# Altium PCB Siwa_PCB.PcbDoc (part 2 of 2)
Units mm, origin at the board's own origin, x right, y up, seen from the top; angles counter-clockwise.
Board outline 120 x 90 mm, 2 copper layers (Top Layer, Bottom Layer), stack 1.569 mm thick; 68 components, 95 nets, 317 pads, 67 vias.
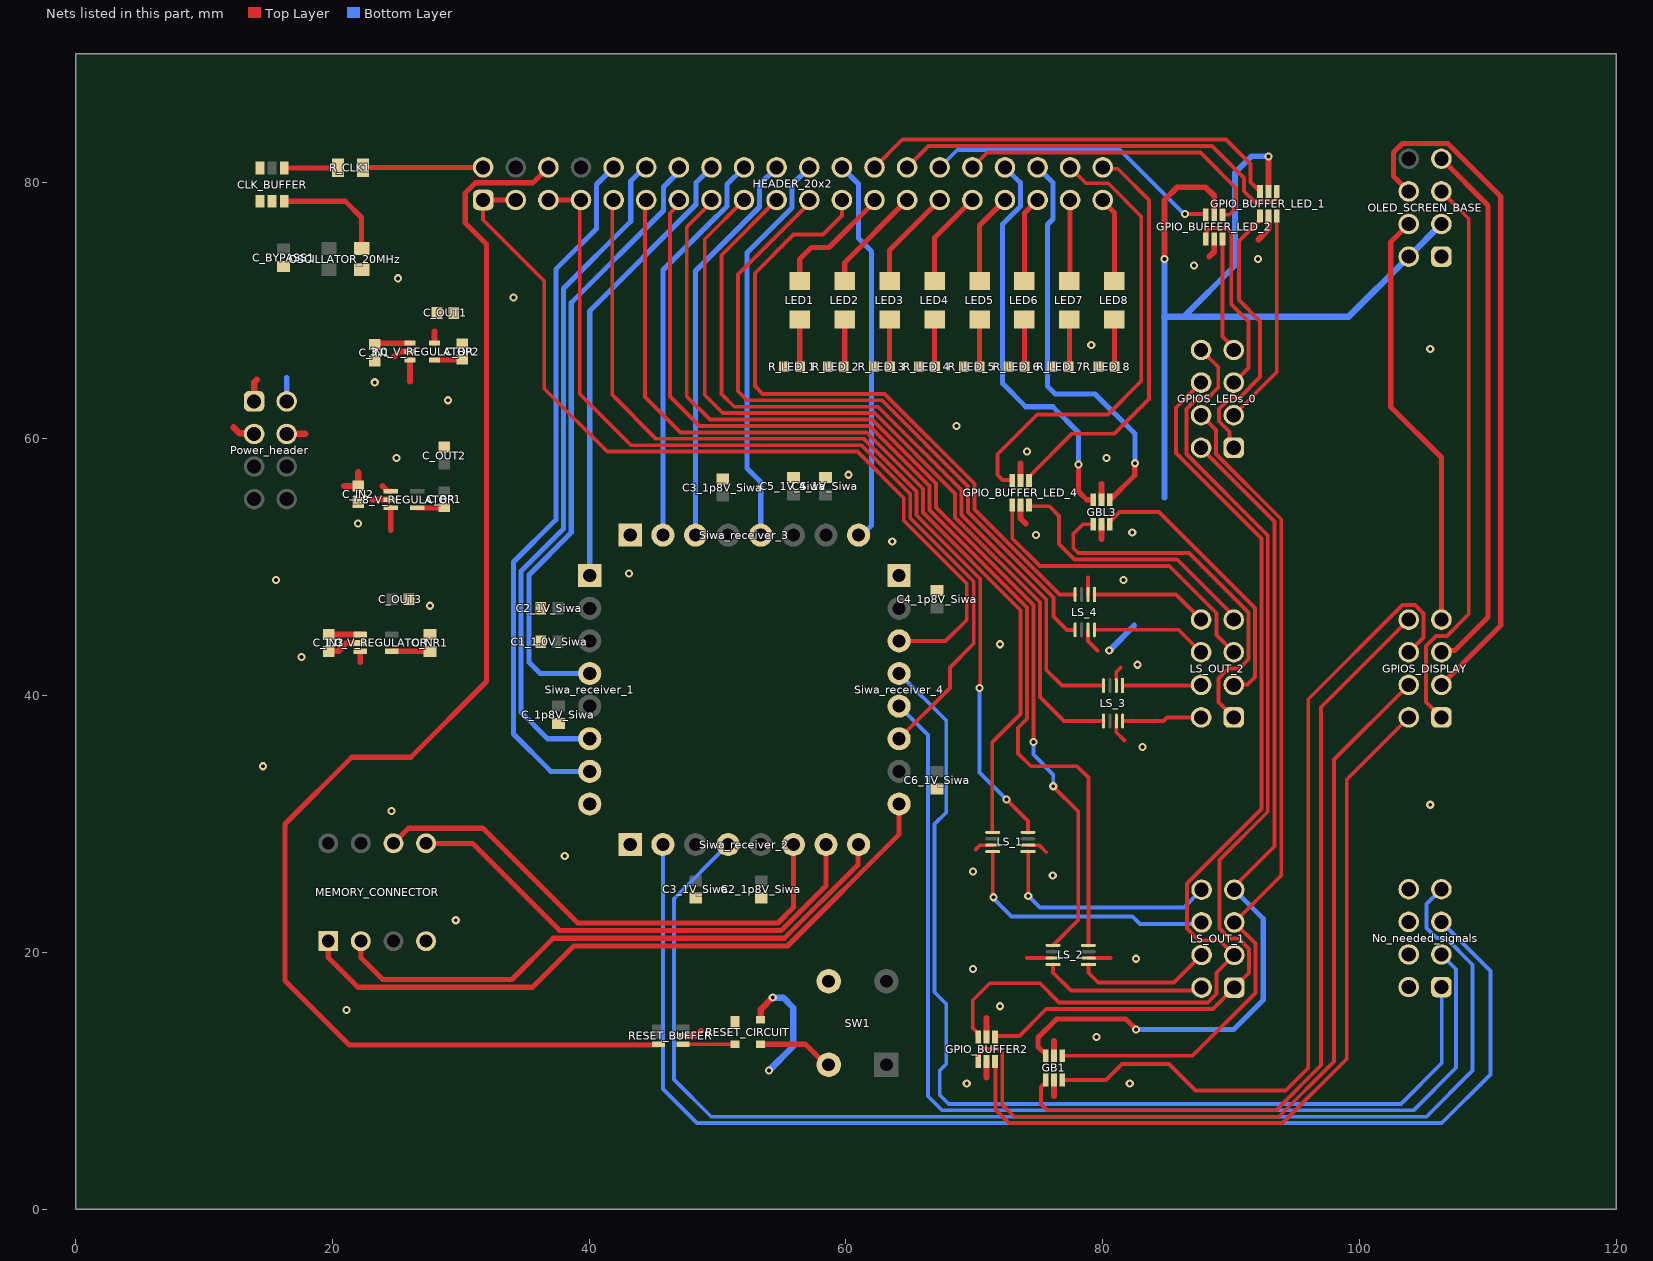
[diagram p2: the nets of this part, all layers, seen from the top]

## Via types
v1: diameter 0.635, hole 0.3, Top Layer to Bottom Layer, 67 vias

## Nets (pads, with @x,y where several pads share a name; then routed paths per layer and width w, separated by ;. In a path a pad name is that pad's centre, name@x,y a point inside that pad or via, vN(x,y) a via of type N, cw(c..) or ccw(c..) an arc to the next point about the centre after c; other vN are vias at no path point) (continued)
3V: GB1.5 GBL3.5 GPIO_BUFFER2.5 GPIO_BUFFER_LED_1.5 GPIO_BUFFER_LED_2.5 GPIO_BUFFER_LED_4.5 LS_1.7 LS_2.7 LS_3.7 LS_4.7 OLED_SCREEN_BASE.2 OLED_SCREEN_BASE.3 Power_header.4 RESET_CIRCUIT.4 | length 98.1
  Top Layer w0.3: 70.1,28 70.45,28.35 LS_1.7@71.424,28.35 ; 74.1,19.55 LS_2.7@76.124,19.55 ; LS_4.7@78.85,45.124 78.85,44.25 79.6,43.5 ; LS_3.7@81.05,38.024 81.05,37.15 81.7,36.5
  Top Layer w0.45: 70.95,10.25 GPIO_BUFFER2.5@70.95,11.5 ; GPIO_BUFFER_LED_4.5@73.6,56.75 73.6,58.1 ; 76.2,8.8 GB1.5@76.2,10.05 ; GBL3.5@79.9,55.25 79.9,56.5 ; v1(84.8,74) 84.8,78.6 85.8,79.6 88,79.6 88.675,78.925 GPIO_BUFFER_LED_2.5@88.675,77.896 ; GPIO_BUFFER_LED_1.5@92.9,79.7 v1(92.9,82)
  Top Layer w0.5: Power_header.4@16.44,60.38 17.899,60.38 ; RESET_CIRCUIT.4@53.35,14.75 53.35,15.55 v1(54.3,16.5)
  Bottom Layer w0.45: v1@72,43.9 v1(72,44) ; v1(80.5,43.5) 82.45,45.45 ; 84.8,55.415 84.8,69.5 v1(84.8,74) ; 86.3,69.5 90.3,73.5 90.3,80.726 91.574,82 v1(92.9,82)
  Bottom Layer w0.5: v1(54,10.8) 55.9,12.7 55.9,15.7 55.126,16.474 54.326,16.474 v1(54.3,16.5) ; 84.8,69.5 86.3,69.5 99.14,69.5 OLED_SCREEN_BASE.2@103.83,74.19 103.83,74.23 103.9,74.3 103.94,74.3 OLED_SCREEN_BASE.3@106.37,76.73
  other v1: 69.4,9.8 82.1,9.8 69.9,18.7 69.9,26.3 14.6,34.5 83.1,36 15.6,49 80.3,58.5 74.1,59
3V_regulator: 3.0_V_REGULATOR.5 C_BP2.2 C_OUT1.2 Power_header.3 | length 2.7
  Top Layer w0.5: 12.3,60.9 12.764,60.436 13.844,60.436 Power_header.3@13.9,60.38 ; 3.0_V_REGULATOR.5@27.95,67.45 27.95,68.35
5V_input: 1.0_V_REGULATOR.1 1.0_V_REGULATOR.3 1.8_V_REGULATOR.1 1.8_V_REGULATOR.3 3.0_V_REGULATOR.1 3.0_V_REGULATOR.3 C_IN1.2 C_IN2.2 C_IN3.2 Power_header.1 | length 14.2
  Top Layer w0.45: C_IN3.2@19.7,44.75 1.0_V_REGULATOR.1@22.175,44.75 ; 22.175,42.6 1.0_V_REGULATOR.3@22.175,43.45 ; C_IN1.2@23.4,67.45 3.0_V_REGULATOR.1@26.05,67.45 ; 23.895,56.326 24.299,55.922 1.8_V_REGULATOR.1@24.549,55.922 ; 24.549,52.9 1.8_V_REGULATOR.3@24.549,54.622 ; 26.05,64.45 3.0_V_REGULATOR.3@26.05,66.15
  Top Layer w0.5: Power_header.1@13.9,62.92 13.9,64.4 14.1,64.6 ; C_IN3.2@19.674,44.749 C_IN3.2@19.699,44.749 ; 20.926,56.326 C_IN2.2@21.998,56.326 21.998,57.4
GND: 1.0_V_REGULATOR.2 1.8_V_REGULATOR.2 3.0_V_REGULATOR.2 C1_1.0V_Siwa.1 C2_1p8V_Siwa.1 C2_1V_Siwa.1 C3_1p8V_Siwa.1 C3_1V_Siwa.1 C4_1p8V_Siwa.2 C4_1V_Siwa.1 C5_1V_Siwa.1 C6_1V_Siwa.1 C_1p8V_Siwa.1 C_BYPASS1.1 C_IN1.1 C_IN2.1 C_IN3.1 C_NR1.1 C_OUT1.1 C_OUT2.1 C_OUT3.1 CLK_BUFFER.1 CLK_BUFFER.2 CLK_BUFFER.6 GB1.2 GBL3.2 GPIO_BUFFER2.2 GPIO_BUFFER_LED_1.2 GPIO_BUFFER_LED_2.2 GPIO_BUFFER_LED_4.2 LS_1.2 LS_2.2 LS_3.2 LS_4.2 MEMORY_CONNECTOR.4 No_needed_signals.2 No_needed_signals.4 No_needed_signals.6 No_needed_signals.8 OLED_SCREEN_BASE.1 OSCILLATOR_20MHz.2 Power_header.2 R_LED_1.2 R_LED_2.2 R_LED_3.2 R_LED_4.2 R_LED_5.2 R_LED_6.2 R_LED_7.2 R_LED_8.2 RESET_BUFFER.2 RESET_CIRCUIT.1 Siwa_receiver_1.8 Siwa_receiver_2.1 Siwa_receiver_3.1 Siwa_receiver_4.1 SW1.4 | length 23.7
  Top Layer w0.3: LS_1.2@74.176,28.35 75.032,28.35 75.6,27.8 ; LS_4.2@78.85,47.856 78.85,49.2 ; LS_2.2@78.876,19.55 80.6,19.55 ; LS_3.2@81.05,41.3 81.05,41.85 81.4,42.2
  Top Layer w0.45: C_IN3.1@19.699,43.449 20.449,43.449 21.1,44.1 1.0_V_REGULATOR.2@22.175,44.1 ; 23.1,55.272 1.8_V_REGULATOR.2@24.549,55.272 ; 24.8,66.4 25.2,66.8 3.0_V_REGULATOR.2@26.05,66.8 ; RESET_BUFFER.2@47.3,13.5 48.3,13.5 48.7,13.9 ; GPIO_BUFFER2.2@70.95,13.3 70.95,14.9 ; GPIO_BUFFER_LED_4.2@73.6,54.85 73.6,53.8 74,53.4 ; GB1.2@76.2,12.3 76.2,13.1 ; 79.9,52.2 GBL3.2@79.9,53.35 ; 88.3,74.2 88.675,74.575 GPIO_BUFFER_LED_2.2@88.675,75.55 ; 92.1,75.5 92.9,76.3 GPIO_BUFFER_LED_1.2@92.9,77.35
  Top Layer w0.5: C_IN2.1@21.926,55.026 C_IN2.1@21.998,55.026
  Bottom Layer w0.45: Power_header.2@16.44,62.92 16.44,64.76
  other v1: 79.5,13.4 21.1,15.5 72,15.8 82.6,19.5 29.6,22.5 76.1,26 38.1,27.5 24.6,31 105.5,31.5 82.7,42.4 17.6,43 27.6,47 81.6,49 43.1,49.5 63.6,52 74.8,52.5 82.3,52.7 22,53.4 60.2,57.2 25,58.5 68.6,61 29,63 23.3,64.4 105.5,67 79.1,67.3 34.1,71 25.1,72.5 87.1,73.5 92.1,74
GPIO_LED_0: HEADER_20x2.25 LED1.2 | length 9.8
  Top Layer w0.4: LED1.2@56.4,72.3 56.4,74 57.3,74.9 58.678,74.9 62.278,78.5 62.4,78.5 62.3,78.6 HEADER_20x2.25@62.22,78.6
GPIO_LED_1: HEADER_20x2.27 LED2.2 | length 8.4
  Top Layer w0.4: LED2.2@59.9,72.3 59.9,73.74 HEADER_20x2.27@64.76,78.6 HEADER_20x2.27@64.76,78.66
GPIO_LED_2: HEADER_20x2.29 LED3.2 | length 7.9
  Top Layer w0.4: LED3.2@63.4,72.3 63.4,74.7 HEADER_20x2.29@67.3,78.6
GPIO_LED_3: HEADER_20x2.31 LED4.2 | length 7.6
  Top Layer w0.4: LED4.2@66.9,72.3 66.9,75.66 69.64,78.4 69.8,78.4 69.84,78.44 HEADER_20x2.31@69.84,78.6
GPIO_LED_4: HEADER_20x2.33 LED5.2 | length 7.3
  Top Layer w0.4: LED5.2@70.4,72.3 70.4,76.62 HEADER_20x2.33@72.38,78.6 HEADER_20x2.33@72.6,78.6
GPIO_LED_5: HEADER_20x2.35 LED6.2 | length 6.9
  Top Layer w0.4: LED6.2@73.9,72.3 73.9,77.58 74.82,78.5 75,78.5 74.92,78.58 HEADER_20x2.35@74.92,78.6
GPIO_LED_6: HEADER_20x2.37 LED7.2 | length 6.4
  Top Layer w0.4: LED7.2@77.4,72.3 77.46,72.36 77.46,78.54 77.4,78.6 HEADER_20x2.37@77.46,78.6
GPIO_LED_7: HEADER_20x2.39 LED8.2 | length 6.7
  Top Layer w0.4: HEADER_20x2.39@80,78.6 80,78.52 80.9,77.62 LED8.2@80.9,72.3
GPIO_PAD_0: HEADER_20x2.10 Siwa_receiver_1.7 | length 54.5
  Bottom Layer w0.4: Siwa_receiver_1.7@40.04,34.1 37,34.1 34.1,37 34.1,50.4 37.4,53.7 37.4,73.2 40.56,76.36 40.56,79.8 HEADER_20x2.10@41.9,81.14
GPIO_PAD_0_OUT: HEADER_20x2.9 LS_1.4 | length 72.2
  Top Layer w0.3: HEADER_20x2.9@41.9,78.6 41.8,78.5 41.8,63.4 45.2,60 61.407,60 65.5,55.907 65.5,54.043 70.453,49.09 70.453,40.653 v1(70.4,40.6) ; v1(72.5,31.9) 74.176,30.224 LS_1.4@74.176,29.35
  Bottom Layer w0.3: v1(70.4,40.6) 70.4,34 v1(72.5,31.9)
GPIO_PAD_1: HEADER_20x2.12 Siwa_receiver_1.6 | length 52.6
  Bottom Layer w0.4: Siwa_receiver_1.6@40.04,36.64 36.76,36.64 34.7,38.7 34.7,49.7 38,53 38,71.7 43.24,76.94 43.24,80.077 HEADER_20x2.12@44.303,81.14
GPIO_PAD_1_OUT: HEADER_20x2.11 LS_1.5 | length 70.8
  Top Layer w0.3: HEADER_20x2.11@44.44,78.6 44.34,78.5 44.34,63.26 47.1,60.5 61.614,60.5 66,56.114 66,54.25 73.6,46.65 73.6,38.576 71.385,36.361 LS_1.5@71.385,29.389
GPIO_PAD_2: HEADER_20x2.14 Siwa_receiver_1.4 | length 48.6
  Top Layer w0.4: HEADER_20x2.14@46.655,81.14 HEADER_20x2.14@46.98,81.14
  Bottom Layer w0.4: Siwa_receiver_1.4@40.04,41.72 36.18,41.72 35.3,42.6 35.3,49.4 38.6,52.7 38.6,70.6 45.78,77.78 45.78,79.615 46.75,80.586 HEADER_20x2.14@46.75,81.045
GPIO_PAD_2_OUT: HEADER_20x2.13 LS_2.4 | length 82.2
  Top Layer w0.3: HEADER_20x2.13@46.98,78.6 46.98,78.248 46.3,77.568 46.3,63.3 48.6,61 61.821,61 66.5,56.321 66.5,54.457 74.1,46.857 74.1,38.2 73.4,37.5 73.4,35.5 74.4,34.5 77.984,34.5 78.876,33.608 LS_2.4@78.876,20.55
GPIO_PAD_3: HEADER_20x2.16 Siwa_receiver_1.1 | length 35.7
  Bottom Layer w0.4: Siwa_receiver_1.1@40.04,49.34 40.04,69.963 48.32,78.243 48.32,79.94 HEADER_20x2.16@49.52,81.14
GPIO_PAD_3_OUT: HEADER_20x2.15 LS_2.5 | length 79.7
  Top Layer w0.3: HEADER_20x2.15@49.52,78.6 49.52,78.424 47.6,76.504 47.6,63.3 49.4,61.5 62.028,61.5 67,56.528 67,54.664 74.6,47.064 v1(74.6,36.4) ; LS_2.5@76.124,20.55 78.091,22.517 78.091,30.98 v1(76.136,32.935)
  Bottom Layer w0.3: v1(74.6,36.4) 74.6,35.4 76.136,33.864 v1(76.136,32.935)
GPIO_PAD_4: HEADER_20x2.18 Siwa_receiver_3.2 | length 31.6
  Bottom Layer w0.4: Siwa_receiver_3.2@45.74,52.5 45.74,73.14 50,77.4 50.017,77.4 50.72,78.103 50.72,79.8 52,81.08 52,81.3 52.06,81.24 HEADER_20x2.18@52.06,81.14
GPIO_PAD_4_OUT: HEADER_20x2.17 LS_3.5 | length 63.4
  Top Layer w0.3: HEADER_20x2.17@52.06,78.6 49,75.54 49,63.4 50.4,62 62.236,62 68.5,55.736 68.5,53.872 75.1,47.272 75.1,39.9 76.976,38.024 LS_3.5@80.05,38.024
GPIO_PAD_5: HEADER_20x2.20 Siwa_receiver_3.3 | length 31.5
  Bottom Layer w0.4: Siwa_receiver_3.3@48.28,52.5 48.28,73.08 53.26,78.06 53.26,79.8 54.56,81.1 54.7,81.1 54.66,81.14 HEADER_20x2.20@54.6,81.14
GPIO_PAD_5_OUT: HEADER_20x2.19 LS_3.4 | length 60.4
  Top Layer w0.3: HEADER_20x2.19@54.6,78.6 50.3,74.3 50.3,63.5 51.3,62.5 62.5,62.5 69,56 69,54.079 75.6,47.479 75.6,42 76.824,40.776 LS_3.4@80.05,40.776
GPIO_PAD_6: HEADER_20x2.22 Siwa_receiver_3.5 | length 31.2
  Bottom Layer w0.4: Siwa_receiver_3.5@53.36,52.5 53.36,56.64 52.3,57.7 52.3,74.5 55.8,78 55.8,79.8 HEADER_20x2.22@57.14,81.14 HEADER_20x2.22@57.14,81.24
GPIO_PAD_6_OUT: HEADER_20x2.21 LS_4.5 | length 53.2
  Top Layer w0.3: HEADER_20x2.21@57.14,78.6 57.14,78.348 56.736,77.944 56.736,77.936 51.6,72.8 51.6,63.7 52.3,63 62.793,63 69.5,56.293 69.5,54.286 76.15,47.636 76.15,46.168 77.218,45.1 LS_4.5@77.818,45.1
GPIO_PAD_7: HEADER_20x2.24 Siwa_receiver_3.8 | length 30.2
  Bottom Layer w0.4: HEADER_20x2.24@59.68,81.14 60.98,79.84 60.98,75.62 62,74.6 62,53.27 61.23,52.5 Siwa_receiver_3.8@60.98,52.5
GPIO_PAD_7_OUT: HEADER_20x2.23 LS_4.4 | length 51.5
  Top Layer w0.3: HEADER_20x2.23@59.68,78.6 59.68,77.38 58.2,75.9 55.9,75.9 52.9,72.9 52.9,64.1 53.5,63.5 63,63.5 70,56.5 70,54.493 76.617,47.876 LS_4.4@77.85,47.876
H_LED_4: GBL3.6 HEADER_20x2.34 | length 31.4
  Top Layer w0.4: v1(78.1,58) 78.1,55.9 78.75,55.25 GBL3.6@79.25,55.25
  Bottom Layer w0.4: HEADER_20x2.34@72.38,81.14 73.58,79.94 73.58,78.103 72.2,76.723 72.2,64.3 74,62.5 76.1,62.5 78.1,60.5 v1(78.1,58)
H_LED_5: GBL3.4 HEADER_20x2.36 | length 32
  Top Layer w0.4: GBL3.4@80.55,55.25 80.562,55.238 82.489,57.164 82.489,58.089 v1(82.5,58.1)
  Bottom Layer w0.4: HEADER_20x2.36@74.92,81.14 76.12,79.94 76.12,77.12 75.7,76.7 75.7,64.1 76.3,63.5 79.4,63.5 82.5,60.4 v1(82.5,58.1)
H_LED_6: GPIO_BUFFER_LED_4.6 HEADER_20x2.38 | length 36.4
  Top Layer w0.3: GPIO_BUFFER_LED_4.6@72.95,56.75 72.9,56.8 72.2,56.8 71.8,57.2 71.8,58.8 74.9,61.9 80.4,61.9 83,64.5 83,77.326 80.426,79.9 78.7,79.9 HEADER_20x2.38@77.46,81.14
H_LED_7: GPIO_BUFFER_LED_4.4 HEADER_20x2.40 | length 32.3
  Top Layer w0.3: GPIO_BUFFER_LED_4.4@74.25,56.75 74.325,56.825 74.325,57.125 77.6,60.4 80.9,60.4 83.6,63.1 83.6,78.6 81.164,81.036 80.104,81.036 HEADER_20x2.40@80,81.14
MAIP: No_needed_signals.3 Siwa_receiver_4.5 | length 83.7
  Bottom Layer w0.3: Siwa_receiver_4.5@64.14,39.18 66.4,36.92 66.4,8.8 67.5,7.7 104.2,7.7 107.52,11.02 107.52,18.69 106.4,19.81 106.4,19.9 106.37,19.87 No_needed_signals.3@106.37,19.84
Net1.0_V_REGULATOR_4: 1.0_V_REGULATOR.4 C_NR1.2 | length 2.9
  Top Layer w0.4: 1.0_V_REGULATOR.4@24.625,43.45 C_NR1.2@27.575,43.45
Net1.8_V_REGULATOR_4: 1.8_V_REGULATOR.4 C_BP1.1 | length 2.1
  Top Layer w0.4: 1.8_V_REGULATOR.4@26.599,54.622 28.647,54.622 C_BP1.1@28.7,54.675
Net3.0_V_REGULATOR_4: 3.0_V_REGULATOR.4 C_BP2.1 | length 2.1
  Top Layer w0.4: 3.0_V_REGULATOR.4@27.95,66.15 C_BP2.1@30.075,66.15
NetCLK_BUFFER_3: CLK_BUFFER.3 OSCILLATOR_20MHz.3 | length 9
  Top Layer w0.4: CLK_BUFFER.3@16.25,78.505 20.995,78.505 22.27,77.23 OSCILLATOR_20MHz.3@22.27,74.825
NetCLK_BUFFER_4: CLK_BUFFER.4 R_CLK1.1 | length 4.2
  Top Layer w0.4: CLK_BUFFER.4@16.255,81.1 R_CLK1.1@20.425,81.1
NetGPIO_BUFFER1_1: GB1.1 GPIOS_LEDs_0.4 LS_OUT_1.5 | length 66.9
  Top Layer w0.3: GB1.1@76.85,11.95 87.001,11.95 91.89,16.839 91.89,20.69 LS_OUT_1.5@90.24,22.34 93.9,26 93.9,53.739 88.81,58.829 88.81,60.69 GPIOS_LEDs_0.4@87.66,61.84
NetGPIO_BUFFER1_3: GB1.3 GPIOS_LEDs_0.2 LS_OUT_1.7 | length 68.7
  Top Layer w0.3: GPIOS_LEDs_0.2@87.66,59.3 87.66,59.272 93.365,53.567 93.365,28.265 90.24,25.14 LS_OUT_1.7@90.24,24.88
  Top Layer w0.4: GB1.3@75.55,11.95 75.55,12.072 74.963,12.659 74.963,13.363 76.4,14.8 81.8,14.8 v1(82.6,14)
  Bottom Layer w0.4: v1(82.6,14) 90.2,14 92.5,16.3 92.5,22.62 LS_OUT_1.7@90.24,24.88
NetGPIO_BUFFER1_4: GB1.4 GPIOS_DISPLAY.8 | length 63.1
  Top Layer w0.3: GB1.4@75.55,10.05 75.55,9.775 75.475,9.7 75.376,9.7 75.2,9.524 75.2,8.2 75.7,7.7 93.493,7.7 97,11.207 97,39.09 GPIOS_DISPLAY.8@103.83,45.92
NetGPIO_BUFFER1_6: GB1.6 GPIOS_DISPLAY.6 | length 65.8
  Top Layer w0.3: GB1.6@76.85,10.05 80.24,10.05 81.49,11.3 85.16,11.3 87.21,9.25 94.25,9.25 96,11 96,39.716 103.354,47.07 104.306,47.07 104.98,46.396 104.98,44.53 GPIOS_DISPLAY.6@103.83,43.38
NetGPIO_BUFFER2_1: GPIO_BUFFER2.1 GPIOS_LEDs_0.8 LS_OUT_1.1 | length 77.9
  Top Layer w0.3: GPIO_BUFFER2.1@71.675,13.4 71.775,13.5 73.5,13.5 75.6,15.6 88.58,15.6 LS_OUT_1.1@90.24,17.26 91.39,18.41 91.39,20.276 90.596,21.07 89.884,21.07 89.09,21.864 89.09,27.189 92.85,30.949 92.85,52.484 86.51,58.824 86.51,62.316 87.302,63.108 88.108,63.108 88.994,63.994 88.994,65.586 GPIOS_LEDs_0.8@87.7,66.88
NetGPIO_BUFFER2_3: GPIO_BUFFER2.3 GPIOS_LEDs_0.6 LS_OUT_1.3 | length 80.1
  Top Layer w0.3: GPIO_BUFFER2.3@70.3,13.4 70.225,13.475 70.225,13.75 69.875,14.1 69.875,16.275 71.2,17.6 75.108,17.6 76.598,16.11 88.176,16.11 88.85,16.784 88.85,18.41 LS_OUT_1.3@90.24,19.8 89.09,20.95 87.464,20.95 86.55,21.864 86.55,25.356 92.35,31.156 92.35,52.25 85.7,58.9 85.7,62.42 GPIOS_LEDs_0.6@87.66,64.38
NetGPIO_BUFFER2_4: GPIO_BUFFER2.4 GPIOS_DISPLAY.4 | length 66.5
  Top Layer w0.3: GPIO_BUFFER2.4@70.3,11.5 70.375,11.575 70.375,12.145 70.73,12.5 71.82,12.5 72.175,12.145 72.175,8.125 73.1,7.2 93.7,7.2 98,11.5 98,35.01 GPIOS_DISPLAY.4@103.83,40.84
NetGPIO_BUFFER2_6: GPIO_BUFFER2.6 GPIOS_DISPLAY.2 | length 61.9
  Top Layer w0.3: GPIO_BUFFER2.6@71.65,11.1 71.65,7.75 72.7,6.7 94,6.7 99,11.7 99,33.47 103.53,38 103.7,38 103.83,38.13 GPIOS_DISPLAY.2@103.83,38.3
NetGPIO_BUFFER_LED_1_1: GPIO_BUFFER_LED_1.1 GPIOS_LEDs_0.1 | length 21.6
  Top Layer w0.3: GPIOS_LEDs_0.1@90.2,59.3 89.864,59.636 89.864,60.55 89.05,61.364 89.05,62.316 89.964,63.23 90.676,63.23 92.25,64.804 92.25,69.15 90.6,70.8 90.6,75.4 92.175,76.975 92.175,77.275 GPIO_BUFFER_LED_1.1@92.25,77.35
NetGPIO_BUFFER_LED_1_3: GPIO_BUFFER_LED_1.3 GPIOS_LEDs_0.3 | length 16.9
  Top Layer w0.3: GPIOS_LEDs_0.3@90.2,61.84 93.55,65.19 GPIO_BUFFER_LED_1.3@93.55,77.35
NetGPIO_BUFFER_LED_1_4: GPIO_BUFFER_LED_1.4 HEADER_20x2.28 | length 32.6
  Top Layer w0.3: HEADER_20x2.28@64.76,81.14 66.42,82.8 88.5,82.8 91,80.3 91,79.28 91.88,78.4 93.27,78.4 93.475,78.605 93.475,79.175 GPIO_BUFFER_LED_1.4@93.55,79.25
NetGPIO_BUFFER_LED_1_6: GPIO_BUFFER_LED_1.6 HEADER_20x2.26 | length 33.4
  Top Layer w0.3: HEADER_20x2.26@62.22,81.14 64.38,83.3 89.6,83.3 91.5,81.4 91.5,80 GPIO_BUFFER_LED_1.6@92.25,79.25
NetGPIO_BUFFER_LED_2_1: GPIO_BUFFER_LED_2.1 GPIOS_LEDs_0.5 | length 15.5
  Top Layer w0.3: GPIO_BUFFER_LED_2.1@88.025,75.55 88.1,75.625 88.1,76.195 88.305,76.4 89.695,76.4 90,76.095 90,70.5 91.35,69.15 91.35,65.53 GPIOS_LEDs_0.5@90.2,64.38
NetGPIO_BUFFER_LED_2_3: GPIO_BUFFER_LED_2.3 GPIOS_LEDs_0.7 | length 9
  Top Layer w0.3: GPIO_BUFFER_LED_2.3@89.325,75.55 89.325,67.963 90.2,67.088 GPIOS_LEDs_0.7@90.2,66.92
NetGPIO_BUFFER_LED_2_4: GPIO_BUFFER_LED_2.4 HEADER_20x2.32 | length 25
  Top Layer w0.3: HEADER_20x2.32@69.84,81.14 71,82.3 87.6,82.3 90.347,79.553 90.347,77.947 89.85,77.45 GPIO_BUFFER_LED_2.4@89.325,77.45
NetGPIO_BUFFER_LED_2_6: GPIO_BUFFER_LED_2.6 HEADER_20x2.30 | length 23.3
  Top Layer w0.3: v1(86.4,77.5) GPIO_BUFFER_LED_2.6@87.975,77.5
  Bottom Layer w0.3: HEADER_20x2.30@67.3,81.14 68.66,82.5 81.338,82.5 86.338,77.5 v1(86.4,77.5)
NetGPIO_BUFFER_LED_3_1: GBL3.1 LS_OUT_2.1 | length 28.8
  Top Layer w0.3: GBL3.1@79.25,53.35 78.45,53.35 77.7,52.6 77.7,51.5 78.1,51.1 86.717,51.1 91.35,46.467 91.35,42.833 90.627,42.11 89.773,42.11 89,41.337 89,39.5 LS_OUT_2.1@90.2,38.3
NetGPIO_BUFFER_LED_3_3: GBL3.3 LS_OUT_2.3 | length 21.8
  Top Layer w0.3: GBL3.3@80.65,53.65 81.3,54.3 84.366,54.3 91.85,46.816 91.85,41.448 91.274,40.872 90.232,40.872 LS_OUT_2.3@90.2,40.84
NetGPIO_BUFFER_LED_4_1: GPIO_BUFFER_LED_4.1 LS_OUT_2.5 | length 24.5
  Top Layer w0.3: GPIO_BUFFER_LED_4.1@72.95,54.85 72.95,52.25 75.1,50.1 85.177,50.1 88.86,46.417 88.86,44.72 LS_OUT_2.5@90.2,43.38
NetGPIO_BUFFER_LED_4_3: GPIO_BUFFER_LED_4.3 LS_OUT_2.7 | length 21.1
  Top Layer w0.3: GPIO_BUFFER_LED_4.3@74.25,54.85 74.25,54.826 74.325,54.751 75.849,54.751 76.6,54 76.6,51.8 77.8,50.6 85.8,50.6 90.2,46.2 LS_OUT_2.7@90.2,45.92
NetGPIOS_DISPLAY_1: GPIOS_DISPLAY.1 OLED_SCREEN_BASE.5 | length 44.5
  Top Layer w0.3: OLED_SCREEN_BASE.5@106.37,79.27 108.5,77.14 108.5,46.353 106.797,44.65 105.943,44.65 105.17,43.877 105.17,39.5 GPIOS_DISPLAY.1@106.4,38.27
  Top Layer w0.4: GPIOS_DISPLAY.1@106.37,38.3 106.37,38.23 106.4,38.2 GPIOS_DISPLAY.1@106.4,38.27
NetGPIOS_DISPLAY_3: GPIOS_DISPLAY.3 OLED_SCREEN_BASE.6 | length 53.9
  Top Layer w0.4: OLED_SCREEN_BASE.6@103.83,79.27 102.63,80.47 102.63,82.307 103.333,83.01 106.867,83.01 111,78.877 111,45.47 106.5,40.97 106.5,40.9 106.44,40.84 GPIOS_DISPLAY.3@106.37,40.84
NetGPIOS_DISPLAY_5: GPIOS_DISPLAY.5 OLED_SCREEN_BASE.7 | length 42
  Top Layer w0.4: GPIOS_DISPLAY.5@106.37,43.38 106.505,43.515 107.415,43.515 110,46.1 110,78.18 OLED_SCREEN_BASE.7@106.37,81.81
NetGPIOS_DISPLAY_7: GPIOS_DISPLAY.7 OLED_SCREEN_BASE.4 | length 33.1
  Top Layer w0.4: OLED_SCREEN_BASE.4@103.83,76.73 102.43,75.33 102.43,62.477 106.37,58.537 106.37,46.07 106.3,46 106.37,45.93 GPIOS_DISPLAY.7@106.37,45.92
NetHEADER_20x2_1: HEADER_20x2.1 HEADER_20x2.3 Siwa_receiver_4.3 | length 68.2
  Top Layer w0.3: HEADER_20x2.1@31.74,78.6 31.74,77.06 36.5,72.3 36.5,63.905 41.405,59 60.9,59 64.5,55.4 64.5,53.629 69.4,48.729 69.4,45.9 67.76,44.26 Siwa_receiver_4.3@64.14,44.26
  Top Layer w0.4: HEADER_20x2.1@31.74,78.6 HEADER_20x2.3@34.28,78.6
NetHEADER_20x2_2: HEADER_20x2.2 R_CLK1.2 | length 9.4
  Top Layer w0.4: R_CLK1.2@22.375,81.14 HEADER_20x2.2@31.74,81.14
NetHEADER_20x2_5: HEADER_20x2.5 HEADER_20x2.7 Siwa_receiver_4.6 | length 70.2
  Top Layer w0.3: HEADER_20x2.7@39.36,78.6 39.26,78.5 39.26,63.5 43.26,59.5 61.2,59.5 65,55.7 65,53.836 69.953,48.883 69.953,44.053 68.1,42.2 68.1,40.6 Siwa_receiver_4.6@64.14,36.64
  Top Layer w0.4: HEADER_20x2.5@36.82,78.6 HEADER_20x2.7@39.36,78.6
NetHEADER_20x2_6: HEADER_20x2.6 RESET_BUFFER.6 | length 109.7
  Top Layer w0.3: RESET_BUFFER.6@45.35,12.8 RESET_BUFFER.6@45.4,12.85
  Top Layer w0.4: HEADER_20x2.6@36.82,81.14 35.62,79.94 31.149,79.94 30.35,79.141 30.35,76.808 32,75.158 32,41.1 26.1,35.2 21.5,35.2 16.3,30 16.3,17.8 21.3,12.8 RESET_BUFFER.6@45.35,12.8
NetLED1_1: LED1.1 R_LED_1.1 | length 3.7
  Top Layer w0.4: LED1.1@56.4,69.3 56.4,65.627 R_LED_1.1@56.427,65.6
NetLED2_1: LED2.1 R_LED_2.1 | length 3.6
  Top Layer w0.4: R_LED_2.1@59.827,65.6 59.9,65.673 LED2.1@59.9,69.2
NetLED3_1: LED3.1 R_LED_3.1 | length 3.7
  Top Layer w0.4: LED3.1@63.4,69.3 63.4,65.627 R_LED_3.1@63.427,65.6
NetLED4_1: LED4.1 R_LED_4.1 | length 3.7
  Top Layer w0.4: LED4.1@66.9,69.3 66.9,65.627 R_LED_4.1@66.927,65.6
NetLED5_1: LED5.1 R_LED_5.1 | length 3.7
  Top Layer w0.4: LED5.1@70.4,69.3 70.4,65.627 R_LED_5.1@70.427,65.6
NetLED6_1: LED6.1 R_LED_6.1 | length 3.7
  Top Layer w0.4: LED6.1@73.9,69.3 73.9,65.627 R_LED_6.1@73.927,65.6
NetLED7_1: LED7.1 R_LED_7.1 | length 3.7
  Top Layer w0.4: R_LED_7.1@77.327,65.6 77.4,65.673 LED7.1@77.4,69.3
NetLED8_1: LED8.1 R_LED_8.1 | length 3.7
  Top Layer w0.4: LED8.1@80.9,69.3 80.9,65.627 R_LED_8.1@80.927,65.6
NetLS_1_1: LS_1.1 LS_OUT_1.8 | length 17.9
  Top Layer w0.3: v1(74.2,24.4) LS_1.1@74.2,27.85
  Bottom Layer w0.3: v1(74.2,24.4) 75.1,23.5 86.32,23.5 LS_OUT_1.8@87.7,24.88
NetLS_1_8: LS_1.8 LS_OUT_1.6 | length 20.8
  Top Layer w0.3: LS_1.8@71.424,27.85 71.424,24.376 v1(71.5,24.3)
  Bottom Layer w0.3: v1(71.5,24.3) 71.5,24.2 72.9,22.8 82.3,22.8 82.89,22.21 87.57,22.21 LS_OUT_1.6@87.7,22.34
NetLS_2_1: LS_2.1 LS_OUT_1.4 | length 10.7
  Top Layer w0.3: LS_2.1@78.876,19.05 78.876,18.418 79.644,17.65 84.404,17.65 85.55,17.65 LS_OUT_1.4@87.7,19.8
NetLS_2_8: LS_2.8 LS_OUT_1.2 | length 12.9
  Top Layer w0.3: LS_2.8@76.124,19.05 76.124,18.418 77.518,17.024 87.464,17.024 LS_OUT_1.2@87.7,17.26
NetLS_3_1: LS_3.1 LS_OUT_2.4 | length 6.1
  Top Layer w0.3: LS_3.1@81.55,40.776 87.596,40.776 LS_OUT_2.4@87.66,40.84
NetLS_3_8: LS_3.8 LS_OUT_2.2 | length 6.2
  Top Layer w0.3: LS_3.8@81.55,38.024 84.724,38.024 85,38.3 LS_OUT_2.2@87.66,38.3
NetLS_4_1: LS_4.1 LS_OUT_2.8 | length 9.1
  Top Layer w0.3: LS_4.1@79.35,47.876 85.704,47.876 LS_OUT_2.8@87.66,45.92
NetLS_4_8: LS_4.8 LS_OUT_2.6 | length 9
  Top Layer w0.3: LS_4.8@79.382,45.124 85.916,45.124 LS_OUT_2.6@87.66,43.38
NetMEMORY_CONNECTOR_1: MEMORY_CONNECTOR.1 Siwa_receiver_4.8 | length 54
  Top Layer w0.4: MEMORY_CONNECTOR.1@19.675,20.875 19.675,19.595 21.985,17.285 35.585,17.285 38.8,20.5 55.446,20.5 64.14,29.194 Siwa_receiver_4.8@64.14,31.56
NetMEMORY_CONNECTOR_2: MEMORY_CONNECTOR.2 Siwa_receiver_2.8 | length 46
  Top Layer w0.4: MEMORY_CONNECTOR.2@22.215,20.875 22.215,19.585 23.915,17.885 33.985,17.885 37.2,21.1 55.197,21.1 60.949,26.851 60.949,28.369 Siwa_receiver_2.8@60.98,28.4
NetMEMORY_CONNECTOR_5: MEMORY_CONNECTOR.5 Siwa_receiver_2.7 | length 38.6
  Top Layer w0.4: MEMORY_CONNECTOR.5@27.295,28.495 30.905,28.495 37.7,21.7 54.949,21.7 58.44,25.191 Siwa_receiver_2.7@58.44,28.4
NetMEMORY_CONNECTOR_6: MEMORY_CONNECTOR.6 Siwa_receiver_2.6 | length 40.1
  Top Layer w0.4: MEMORY_CONNECTOR.6@24.755,28.495 25.93,29.67 31.73,29.67 35.779,25.621 39.1,22.3 54.7,22.3 55.9,23.5 Siwa_receiver_2.6@55.9,28.4
NetRESET_BUFFER_1: RESET_BUFFER.1 RESET_CIRCUIT.2 | length 4
  Top Layer w0.3: RESET_BUFFER.1@47.3,12.85 RESET_CIRCUIT.2@51.35,12.85
NetRESET_CIRCUIT_3: RESET_CIRCUIT.3 SW1.2 | length 5.9
  Top Layer w0.4: RESET_CIRCUIT.3@53.4,12.85 56.85,12.85 58.45,11.25 SW1.2@58.65,11.25
POC_CONTROL: No_needed_signals.1 Siwa_receiver_4.4 | length 82
  Bottom Layer w0.3: Siwa_receiver_4.4@64.14,41.72 67.807,38.053 67.807,30.907 66.9,30 66.9,16.9 67.807,15.993 67.807,11.307 67.3,10.8 67.3,8.9 68,8.2 103.22,8.2 106.4,11.38 106.4,17.3 No_needed_signals.1@106.37,17.3
UART_RX: No_needed_signals.7 Siwa_receiver_2.4 | length 101.4
  Bottom Layer w0.3: Siwa_receiver_2.4@50.82,28.4 46.6,24.18 46.6,10.1 49.5,7.2 105.2,7.2 108.8,10.8 108.8,19.036 106.726,21.11 106.014,21.11 105.22,21.904 105.22,23.77 No_needed_signals.7@106.37,24.92
UART_TX: No_needed_signals.5 Siwa_receiver_2.2 | length 99.6
  Bottom Layer w0.3: Siwa_receiver_2.2@45.74,28.4 45.74,9.36 48.4,6.7 106.4,6.7 110.2,10.5 110.2,18.55 No_needed_signals.5@106.37,22.38
pads on no net: HEADER_20x2.4 HEADER_20x2.8 OLED_SCREEN_BASE.8 RESET_BUFFER.3 RESET_BUFFER.4 SW1.1 SW1.3

## Polygon pours and split planes (outlines as drawn)
GND on Top Layer "GND_L01_P039" (solid, pour order 39): 0,90 120,90 120,0 0,0
1.8V on Top Layer "1.8V_L01_P038" (solid, pour order 38): 23.785,29.485 22.785,30.485 19.285,30.485 18.285,29.485 18.285,25.985 19.285,24.985 21.785,24.985 22.785,23.985 22.785,19.985 23.785,18.985 25.285,18.985 26.285,19.985 26.285,23.985 23.785,26.985
3V on Top Layer "3V_L01_P028" (solid, pour order 28): 70.6,49.5 73.6,47 73.6,38.576 71.385,36.361 71.6,24.6 70.5,23.5 69.5,23.5 69,24 69,38 70.551,39.551
1.8V on Top Layer "1.8V_L01_P036" (solid, pour order 36): 75.1,29 75.6,28.5 77.1,28.5 77.6,29 77.6,31.5 73.1,37 71.1,33.5 75.1,30
1.8V on Top Layer "1.8V_L01_P024" (solid, pour order 24): 79.1,21 80.1,20 80.6,20 81.6,21 81.6,35 81.1,36 80.6,37 74.7,39.5 74.6,35 79.1,33.5
1.8V on Top Layer "1.8V_L01_P029" (solid, pour order 29): 62.1,46 62.1,47.3 62.6,47.8 65.1,47.8 65.4,47.5 69.1,47.5 69.1,46 67.6,44.5 66.1,44.5 65.1,45.6 62.6,45.6
3V on Top Layer "3V_L01_P000" (solid, pour order 0): 69.5,20 72.1,20 74.1,20 75.1,19.5 75.1,18.5 74.6,18 71.1,18 69.6,16.5 69.6,12.5 70.1,12 71.6,12 72.1,11.5 72.1,10 69.6,7.5 55,7.5 52.5,10 17.6,10 13.6,14 13.6,35.5 14.1,36 15.1,36 15.6,35.5 15.6,15 18.6,12 37.6,12 54.6,12 55.5,11 55.5,10 56.5,9 66.1,9 68,10.9 68,18.5
1.8V on Top Layer "1.8V_L01_P001" (solid, pour order 1): 34.6,57.5 35.1,57.5 36.6,56 51.5,56 52,55.5 52,50.5 53.7,48.8 53.7,47.9 53.1,47.3 52.3,47.3 49.6,50 49.6,53.5 49.1,54 36.6,54 34.1,56.5 34.1,57
3V_regulator on Top Layer "3V_REGULATOR_L01_P004" (solid, pour order 4): 12.7,62.1 12.7,65.9 16.1,69.3 25.9,69.3 27.1,68.1 27.1,67.2 30.3,67.2 30.3,68.5 28.8,70 28.8,70.3 15.7,70.3 11.7,66.3 11.7,61.7 11.7,60 12.2,59.5 15.1,59.5 15.1,61.5 13.3,61.5
1.8V_regulator on Top Layer "1.8V_REGULATOR_L01_P007" (solid, pour order 7): 14.3,58.2 12.4,58.2 11.7,57.5 11.7,40.4 16.3,35.8 25.9,35.8 31.4,41.3 31.4,57.5 30.3,58.6 27.6,58.6 26.1,57.1 26.1,55.5 29.6,55.5 30.4,54.7 30.4,41.7 25.5,36.8 16.7,36.8 12.7,40.8 12.7,56 14.3,57.6
1V_regulator on Top Layer "1V_REGULATOR_L01_P008" (solid, pour order 8): 14.2,55.5 14.2,41.3 17.3,38.2 24.9,38.2 28.9,42.2 28.9,48.1 27.7,49.3 25.9,49.3 25.2,48.6 25.2,44.6 23.7,44.6 23.1,44.6 23.1,48.5 24.9,50.3 28.1,50.3 29.9,48.5 29.9,41.8 25.3,37.2 16.9,37.2 13.2,40.9 13.2,55.5
3V on Top Layer "3V_L01_P010" (solid, pour order 10): 17.1,59.72 17.1,60.8 17.6,61.3 18.6,61.3 19.1,60.8 19.1,53.5 16.599,50.999 16.598,48.498 16.1,48 15.1,48 14.6,48.5 14.6,51.5 17.6,54.5 17.6,59.22
5V_input on Top Layer "5V_INPUT_L01_P012" (solid, pour order 12): 21.5,66.1 21.5,64.2 22.7,63 24.2,63 25.7,64.5 25.7,66.1 26.6,66.1 26.6,63.8 23.1,60.3 23.1,58 23.6,57.5 24.1,57 24.1,56.5 23.6,56 21.1,56 20.3,55.2 20.3,53 21.3,52 23.1,52 24.2,53.1 24.2,54.6 25,54.6 25,52.5 23.6,51.1 21.5,51.1 21.1,50.7 21.1,45.4 22.1,44.4 17,44.4 16.1,43.5 16.1,42.5 17.1,41.5 21.2,41.5 21.7,42 21.7,43.5 22.6,43.5 22.6,41.5 21.6,40.5 16.6,40.5 15.1,42 15.1,44.2 19.4,48.5 19.4,51.5 19.4,55.8 21.6,58 21.6,61 17.7,64.9 15.6,64.9 15.1,64.4 15.1,61.5 12.6,61.5 12.6,63.5 18.3,69.2 25.1,69.2 25.6,68.7 25.6,67 22.4,67
1V on Top Layer "1V_L01_P015" (solid, pour order 15): 37.2,48 37,47.8 37,43.2 37.2,43 45.5,43 47,41.5 47,25.1 49.5,25.1 49.5,31.8 50.6,32.9 65.1,32.9 65.6,33.4 67.6,33.4 67.6,35.1 67.4,35.3 60.3,35.3 55.1,40.5 55.1,43 59.6,47.5 59.6,48.3 59.605,48.305 59.605,55.995 59.5,56.1 54.796,56.101 54.7,56.005 54.7,46.3 53.9,45.5 44,45.5 41.5,48
1V on Top Layer "1V_L01_P016" (solid, pour order 16): 28.1,32.5 27.6,32.5 27.1,33 27.1,33.5 36.9,43.3 36.9,48 37.4,48.5 38.1,48.5 38.6,48 38.6,43
3V on Top Layer "3V_L01_P019" (solid, pour order 19): 94.1,80.5 94.1,83 93.6,83.5 90.1,83.5 92.1,80 93.6,80
3V on Top Layer "3V_L01_P021" (solid, pour order 21): 78.715,56.15 80.61,56.15 81.798,57.338 81.9,57.44 81.9,59.4 80.9,59.9 79.1,59.9 78.6,59.4
3V on Top Layer "3V_L01_P023" (solid, pour order 23): 79.2,42 80.3,42 82.1,43.8 82.1,44.3 81.3,45.1 79.7,45.1 79.2,44.6
3V on Top Layer "3V_L01_P026" (solid, pour order 26): 81.6,35 80.6,37 80.55,38.024 84.6,38 85.6,37 85.6,35 84.6,34 82.1,34
1.8V on Top Layer "1.8V_L01_P027" (solid, pour order 27): 75.6,19.5 75.1,19.5 74.6,20 74.1,20 72.1,20 64.1,20 63.1,21 63.1,22.5 63.6,23 72.6,23 73.6,22 75.1,22 75.6,21.5
1.8V on Top Layer "1.8V_L01_P030" (solid, pour order 30): 44.1,13.5 46.6,16 49.1,16 49.6,16.5 49.6,18 49.1,18.5 45.6,18.5 43.1,16 40.1,16 39.6,15.5 39.6,14 40.1,13.5
1.8V on Top Layer "1.8V_L01_P031" (solid, pour order 31): 52.2,25.1 52.7,24.6 54.1,24.6 54.6,25.1 54.6,30 54.1,30.5 52.7,30.5 52.2,30
1.8V on Top Layer "1.8V_L01_P032" (solid, pour order 32): 78.8,44.2 78.8,41.7 78.3,41.2 77.3,41.2 76.8,41.7 76.8,44.7 77.3,45.2 78.3,45.2
3V on Top Layer "3V_L01_P037" (solid, pour order 37): 81.244,11.1 80.084,9.8 75.2,9.8 75.2,8.2 75.7,7.7 83.3,7.7 84.7,9.1 84.7,10.6 84.2,11.1
GND on Bottom Layer "GND_L02_P035" (solid, pour order 35): 0,90 0,0 120,0 120,90
3V on Bottom Layer "3V_L02_P003" (solid, pour order 3): 76.6,62.5 78.6,60.5 78.6,57.5 78.1,57 77.6,57 74.6,60 73.9,60 73.1,59.2 73.1,58.5 76.1,55.5 80.1,55.5 82.1,55.5 83.6,54 83.6,48.5 82.1,47 73.1,47 71,44.9 71,43.6 71.6,43 72.605,43.005 73.1,43.5 73.1,45 74.1,46 81.1,46 81.6,45.5 81.6,44.7 81.8,44.5 82.6,44.5 84.1,43 84.1,38.3 82.2,36.4 82.2,35.54 82.75,35.1 83.5,35.1 85.3,36.9 85.307,55.307 85.3,67.7 86.6,69 90,69 90.3,69.3 90.3,69.7 89.8,70.2 89.8,72.2 89.8,73 89,73 88,72 86,72 85.5,72.5 85.5,74 85,74.5 84.6,74.5 84.1,74 84.1,58.3 83,57.2 82.4,57.2 82.1,57.5 82.1,60.5 79.6,63 77.1,63
1.8V on Bottom Layer "1.8V_L02_P006" (solid, pour order 6): 72.1,22.2 71.6,21.7 71.6,21.3 72.1,20.8 81.1,20.8 81.6,21.3 81.6,21.7 81.1,22.2
1.8V on Bottom Layer "1.8V_L02_P009" (solid, pour order 9): 23.5,23 26,23 26.5,22.5 26.5,16.5 27,16 42.1,16 42.6,15.5 42.6,14 42.1,13.5 24.5,13.5 23,15 23,22.5
1.8V on Bottom Layer "1.8V_L02_P011" (solid, pour order 11): 32.6,59.5 32.6,56 30.6,54 30.6,17 29.1,15.5 34.1,15.5 32.6,17 32.6,53.5 35.6,56.5
1.8V on Bottom Layer "1.8V_L02_P014" (solid, pour order 14): 19.1,70.5 17.6,72 16.6,72 16.1,71.5 16.1,70.5 17.6,69 17.6,65.5 21.6,61.5 21.6,60 20.4,58.8 16.6,58.8 15.9,58.1 15.9,57.4 16.6,56.7 20.3,56.7 23.6,60 30.6,60 34.6,56 35.1,56 35.6,56.5 35.6,57.5 31.6,61.5 23.6,61.5 19.1,66
1.8V on Bottom Layer "1.8V_L02_P017" (solid, pour order 17): 65.6,47.3 65.1,47.8 54.6,47.8 53.3,49.1 52.2,49.1 43.5,40.4 39.1,40.4 38.6,39.9 38.6,38.5 39.1,38 43.6,38 52.2,29.4 52.2,27.5 52.7,27 54,27 54.5,27.5 54.5,29.6 45.6,38.5 45.6,39.5 51.7,45.6 65.1,45.6 65.6,46.1
3V on Bottom Layer "3V_L02_P020" (solid, pour order 20): 69,27 69.5,27.5 70.6,27.5 71.1,27 71.1,18 70.6,17.5 69.5,17.5 69,18
1.8V on Bottom Layer "1.8V_L02_P022" (solid, pour order 22): 54.5,23.5 55,23 64.6,23 65.1,22.5 65.1,21 64.6,20.5 53.2,20.5 48.7,16 47.5,16 47,16.5 47,17.9 52.2,23.1 52.2,28 54.5,28
1.8V on Bottom Layer "1.8V_L02_P025" (solid, pour order 25): 78.3,35.5 77.3,35.5 76.8,36 76.8,43 77.3,43.5 78.3,43.5 78.8,43 78.8,36
1.8V on Bottom Layer "1.8V_L02_P033" (solid, pour order 33): 79.607,27.493 79.6,26 80.1,25.5 81.1,25.5 81.6,26 81.6,29 80.1,30.5 75.6,30.5 75.1,30 75.1,29 75.6,28.5 78.6,28.5
3V on Bottom Layer "3V_L02_P034" (solid, pour order 34): 83.6,8.8 84.1,9.3 84.1,10.3 83.6,10.8 68.6,10.8 68.1,10.3 68.1,9.3 68.6,8.8

## Other copper
Top Layer:
  region net GND: 77.341,48.437 77.341,48.841 77.4,48.9 79.824,48.9 79.868,48.856 79.868,48.437 85.623,48.437 85.755,48.729 84.944,49.54 76.138,49.54 76.023,49.263 76.849,48.437
  region net 3V: 75.2,61.3 72.4,58.5 72.4,58 72.7,57.7 73.9,57.7 76.3,60.1 76.3,60.9 75.8,61.3
  region net 1.8V: 14.8,71.5 17,71.5 17,70.9 14.6,70.9 12.1,73.4 12.1,77 12.6,77.5 12.6,75.6 13.1,75.1 15.8,75.1 15.8,74.6 14.1,74.6 13.3,73.8 13.3,73
Bottom Layer:
  region net 3V: 16.6,49.5 16.1,50 15.1,50 14.6,49.5 14.6,39.5 13.6,38.5 13.6,33.5 14.1,33 15.1,33 15.6,33.5 15.6,37.98 16.6,38.98
  region net 1V: 20.1,53 17.6,55.5 16.564,55.5 16.5,54.6 18.6,52.5 18.6,34.5 20.6,32.5 28.102,32.5 28.601,33 28.601,33.501 28.102,34 21.6,34 20.1,35.5

## Silkscreen, mask and mechanical layers (free items; w line width, h text height)
Top Overlay:
  text "Osc" at 19.8,76.516 h1.5
Top Solder:
  the board outline again, w3
Bottom Solder:
  the board outline again, w3
Border:
  the board outline again, w3